# Altium PCB Kabin_Board_PCB.PcbDoc
Units mm, origin at the board's own origin, x right, y up, seen from the top; angles counter-clockwise.
Board outline 61.34 x 120.52 mm, 2 copper layers (Top Layer, Bottom Layer), stack 1.569 mm thick; 6 components, 11 nets, 30 pads, 0 vias.
Unrouted connection lines stored in the file: 18.
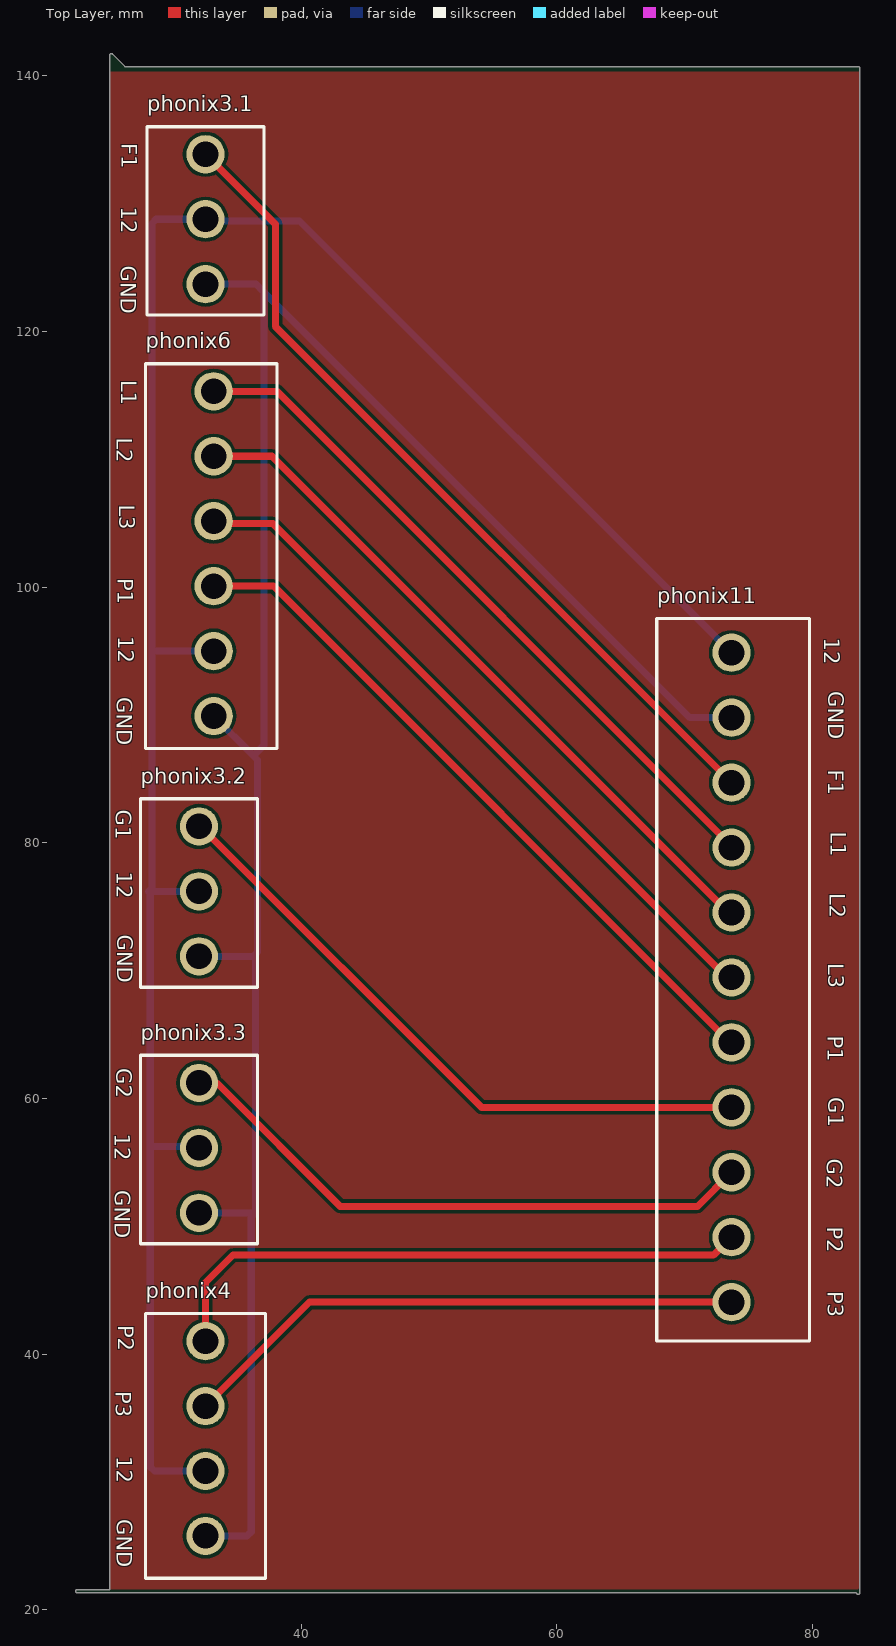
[diagram p0: Top Layer view]
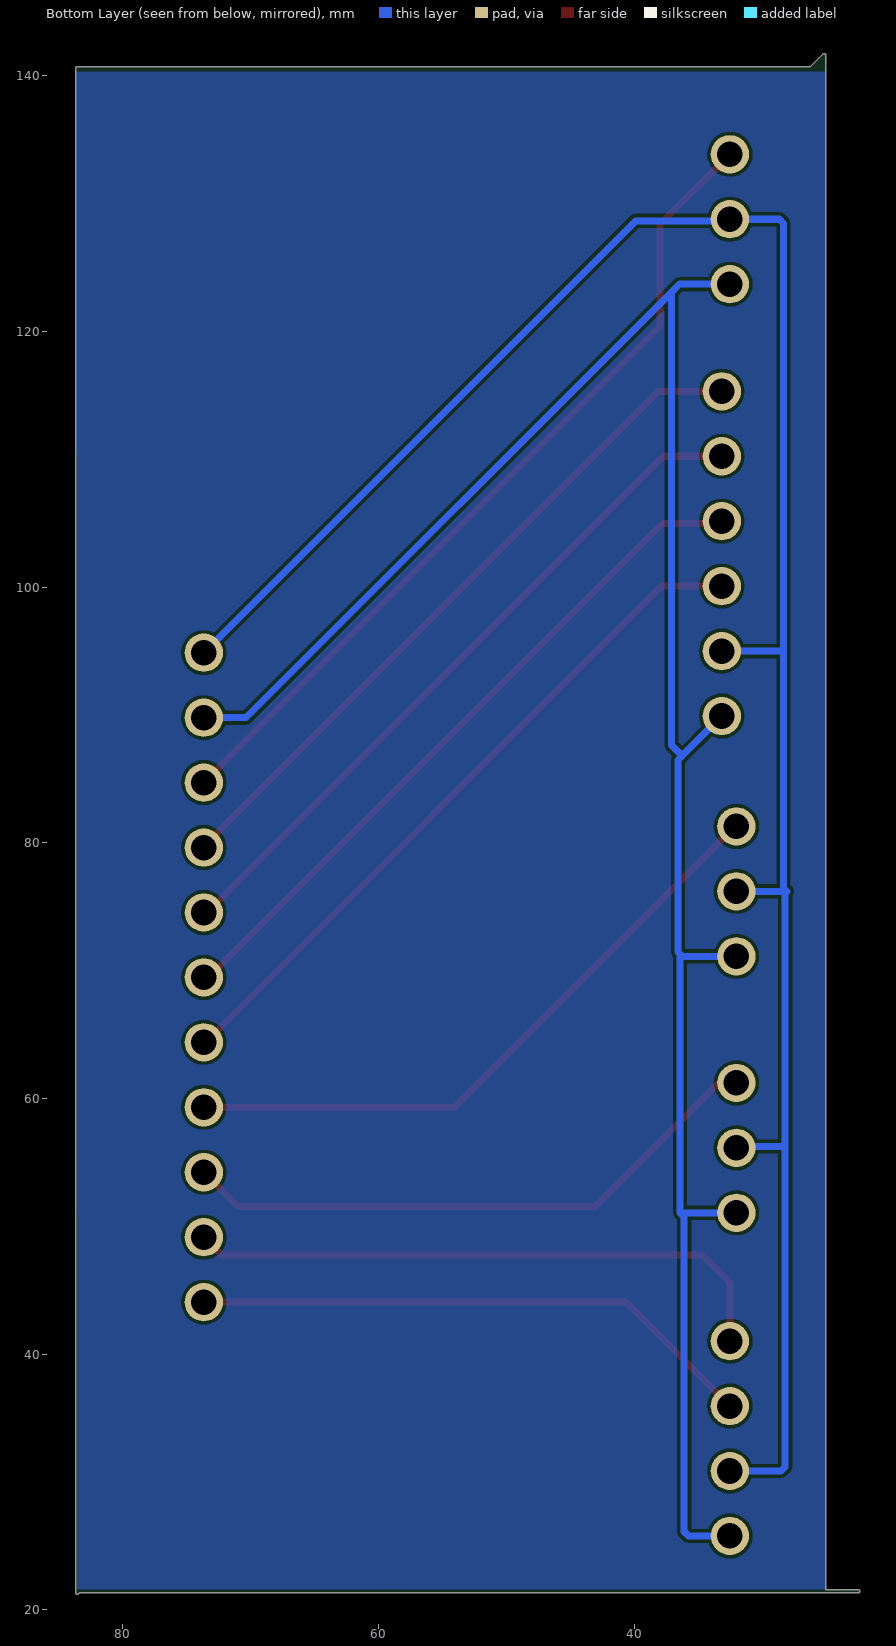
[diagram p1: Bottom Layer view, seen from below]

## Layer stack, top to bottom
Top Solder: solder mask 0.0254, SM-001, Dk 4
Top Layer: signal copper 0.035
Dielectric 1: core 1.4986, Core-043, Dk 4.3
Bottom Layer: signal copper 0.035
Bottom Solder: solder mask 0.0254, SM-001, Dk 4

## Board outline
22.479,21.336 cw(c22.479,21.463) 22.479,21.59 25.019,21.59 25.019,141.605 cw(c25.146,141.605) 25.237,141.695 25.236,141.695 26.215,140.716 83.566,140.716 cw(c83.566,140.589) 83.693,140.589 83.693,21.336 cw(c83.566,21.336) 83.475,21.246 83.476,21.246 83.386,21.336

## Design rules (kind name [scope] priority, off if disabled: settings)
Clearance Clearance_1 [All] p1: gap=0.254 ignorepadtopadclearanceinfootprint=FALSE except(0: Arc-Hole Track-Hole SMDPad-Hole THPad-Hole Via-Hole Fill-Hole Poly-Hole Region-Hole Text-Hole)
Clearance [All] p2: gap=0.254 ignorepadtopadclearanceinfootprint=FALSE except(0: Arc-Hole Track-Hole SMDPad-Hole THPad-Hole Via-Hole Fill-Hole Poly-Hole Region-Hole Text-Hole)
PlaneClearance [InNet('GND')] p1: clearance=0.508
PolygonConnect [InNet('GND') vs InNet('GND')] p1: connectstyle=Relief reliefconductorwidth=0.254 reliefentries=4 polygonreliefangle="90 Angle" airgapwidth=0.254
RoutingVias [All] p1: holewidth=0.711 width=1.27 viastyle="Through Hole" minholewidth=0.711 minwidth=1.27 maxholewidth=0.711 maxwidth=1.27
SolderMaskExpansion [All] p1: expansion=0.102 istentingtop=FALSE
Width [All] p1: maxlimit=0.654 minlimit=0.524 preferedwidth=0.554 toplayer_minwidth=0.554 minimp=50.000000 maximp=50.000000 favimp=50.000000
29 further rules are at their usual default settings.

## Components (designator, comment, footprint, x,y, rotation, side; value= is the part's Value field where it differs from the comment)
phonix3.1 "Component_1" PHONIX3 32.512,123.698 r90 top (schematic designator PHONIX1)
phonix3.2 "Component_1" PHONIX3 32.004,71.12 r90 top (schematic designator PHONIX4)
phonix3.3 "Component_1" PHONIX3 32.004,51.054 r90 top (schematic designator PHONIX5)
phonix4 "Component_1" PHONIX4 32.385,26.162 r90 top (schematic designator PHONIX6)
phonix6 "Component_1" PHONIX5 33.147,94.996 r90 top (schematic designator PHONIX2)
phonix11 "Component_1" PHONIX11 75.565,44.45 r90 top (schematic designator PHONIX3)

## Footprints (in the part's own frame and the unit in brackets; to place one, negate y for a bottom-side part, rotate by r counter-clockwise, add the part's x,y. Pads: shape width x height; smd on the part's side, far side on the other; paste and mask are expansions set on the pad)
PHONIX3 [mm] "PHONIX_DESCRIPT"
  round 3 hole 2: 1(10.16,0) 2(5.08,0) 3(0,0)
  silkscreen extent -2.41,-4.57 12.32,4.57
PHONIX4 [mm] "PHONIX4 PIN DIP"
  round 3 hole 2: 1(14.859,-0.127) 2(9.779,-0.127) 3(4.699,-0.127) 4(-0.381,-0.127)
  silkscreen extent -3.68,-4.83 17.02,4.57
PHONIX5 [mm] "PHONIX 5 PIN DIP"
  round 3 hole 2: 1(20.32,0) 2(15.24,0) 3(10.16,0) 4(5.08,0) 5(0,0) 6(-5.08,0)
  silkscreen extent -7.62,-4.95 22.48,5.33
PHONIX11 [mm] "PHONIX11PIN DIP"
  round 3 hole 2: 1(50.419,1.905) 2(45.339,1.905) 3(40.259,1.905) 4(35.179,1.905) 5(30.099,1.905) 6(25.019,1.905) 7(19.939,1.905) 8(14.859,1.905) 9(9.779,1.905) 10(4.699,1.905) 11(-0.381,1.905)
  silkscreen extent -3.43,-4.19 53.09,7.75

## Part data
phonix3.1 phonix3.2 phonix3.3: "PHONIX3PIN DIP"
phonix11: "PHONIX 11 PIN DIP"

## Nets (pads, with @x,y where several pads share a name; then routed paths per layer and width w, separated by ;. In a path a pad name is that pad's centre, name@x,y a point inside that pad or via, vN(x,y) a via of type N, cw(c..) or ccw(c..) an arc to the next point about the centre after c; other vN are vias at no path point)
F1: phonix3.1.1 phonix11.3 | length 66.2
  Top Layer w0.554: phonix3.1.1 37.973,128.397 37.973,120.396 phonix11.3
G1: phonix3.2.1 phonix11.8 | length 50.8
  Top Layer w0.554: phonix3.2.1 32.131,81.28 54.102,59.309 phonix11.8
G2: phonix3.3.1 phonix11.9 | length 46.8
  Top Layer w0.554: phonix3.3.1 32.046,61.172 33.443,61.172 43.053,51.562 70.993,51.562 phonix11.9
GND: phonix3.1.3 phonix3.2.3 phonix3.3.3 phonix4.4 phonix6.6 phonix11.2 | length 170.1
  Bottom Layer w0.554: phonix3.3.3 36.414,51.054 ; phonix3.2.3 36.251,71.12 36.414,71.282 ; phonix4.4 35.765,25.781 36.089,26.106 36.089,50.727 36.414,51.051 36.414,71.282 ; phonix3.1.3 36.452,123.698 37.084,123.066 ; phonix6.6 36.258,86.804 ; phonix11.2@73.491,89.958 phonix11.2 70.361,89.789 37.084,123.066 ; 36.258,86.804 36.576,86.487 36.576,71.445 36.414,71.282 ; 36.258,86.804 37.084,87.63 37.084,123.066
L1: phonix6.1 phonix11.4 | length 55.2
  Top Layer w0.554: phonix6.1@33.274,115.316 38.1,115.316 73.66,79.756 phonix11.4
L2: phonix6.2 phonix11.5 | length 55.2
  Top Layer w0.554: phonix6.2@33.274,110.236 37.719,110.236 73.406,74.549 phonix11.5
L3: phonix6.3 phonix11.6 | length 55.2
  Top Layer w0.554: phonix6.3@33.274,105.156 33.46,104.97 37.778,104.97 72.897,69.851 73.016,69.851 73.398,69.469 phonix11.6
P1: phonix6.4 phonix11.7 | length 55.2
  Top Layer w0.554: phonix6.4@33.274,100.076 37.846,100.076 73.533,64.389 phonix11.7
P2: phonix4.1 phonix11.10 | length 47.2
  Top Layer w0.554: phonix4.1 32.512,45.593 34.671,47.752 72.263,47.752 phonix11.10
P3: phonix4.2 phonix11.11 | length 44.5
  Top Layer w0.554: phonix4.2 40.64,44.069 phonix11.11
VCC: phonix3.1.2 phonix3.2.2 phonix3.3.2 phonix4.3 phonix6.5 phonix11.1 | length 174
  Bottom Layer w0.554: 28.194,76.2 28.194,56.239 ; phonix3.3.2 31.899,56.239 28.194,56.239 ; phonix3.2.2 28.321,76.2 28.067,76.2 28.321,76.454 28.321,94.996 ; phonix4.3 28.519,30.861 28.194,31.186 28.194,56.239 ; phonix6.5 28.321,94.996 ; phonix11.1 39.878,128.651 32.639,128.651 phonix3.1.2 28.646,128.778 28.321,128.453 28.321,94.996

## Polygon pours and split planes (outlines as drawn)
no net on Top Layer "NONET_L01_P023" (solid, pour order 23): 83.668,21.641 83.642,21.615 25.019,21.615 25.019,140.386 25.097,140.308 83.661,140.308
no net on Top Layer "NONET_L01_P003" (solid, shelved, pour order 3): 7.239,128.524
no net on Bottom Layer "NONET_L02_P024" (solid, pour order 24): 83.551,21.615 58.761,21.615 58.72,21.656 58.68,21.615 25.019,21.615 25.019,140.276 25.051,140.308 83.661,140.308
GND on Bottom Layer "NONET_L02_P000" (solid, shelved, pour order 0): 40.894,25.573
GND on Bottom Layer "NONET_L02_P002" (solid, shelved, pour order 2): 26.924,9.779
no net on Bottom Layer "NONET_L02_P008" (solid, pour order 8): 34.036,125.349

## Silkscreen, mask and mechanical layers (free items; w line width, h text height)
Top Overlay:
  text "F1" at 25.961,134.719 h1.2 r270
  text "12" at 25.911,129.741 h1.2 r270
  text "GND" at 25.885,125.143 h1.2 r270
  text "L1" at 25.911,116.177 h1.2 r270
  text "L2" at 25.578,111.684 h1.2 r270
  text "L3" at 25.758,106.423 h1.2 r270
  text "P1" at 25.657,100.708 h1.2 r270
  text "12" at 25.682,96.162 h1.2 r270
  text "12" at 80.927,96.035 h1.2 r270
  text "GND" at 81.206,91.844 h1.2 r270
  text "GND" at 25.58,91.387 h1.2 r270
  text "F1" at 81.206,85.697 h1.2 r270
  text "G1" at 25.504,82.573 h1.2 r270
  text "L1" at 81.41,80.871 h1.2 r270
  text "12" at 25.58,77.721 h1.2 r270
  text "L2" at 81.333,76.045 h1.2 r270
  text "GND" at 25.606,72.794 h1.2 r270
  text "L3" at 81.206,70.584 h1.2 r270
  text "P1" at 81.181,64.92 h1.2 r270
  text "G2" at 25.53,62.38 h1.2 r270
  text "G1" at 81.206,60.094 h1.2 r270
  text "12" at 25.428,57.249 h1.2 r270
  text "G2" at 81.105,55.293 h1.2 r270
  text "GND" at 25.428,52.804 h1.2 r270
  text "P2" at 81.156,49.959 h1.2 r270
  text "P3" at 81.181,44.93 h1.2 r270
  text "P2" at 25.682,42.263 h1.2 r270
  text "P3" at 25.479,37.107 h1.2 r270
  text "12" at 25.58,32.027 h1.2 r270
  text "GND" at 25.58,27.099 h1.2 r270